# Altium PCB DP_UART_CH340G.PcbDoc
Units mil, origin at the board's own origin, x right, y up, seen from the top; angles counter-clockwise.
Board outline 1585 x 700 mil, 2 copper layers (Top Layer, Bottom Layer); 14 components, 13 nets, 55 pads, 0 vias.
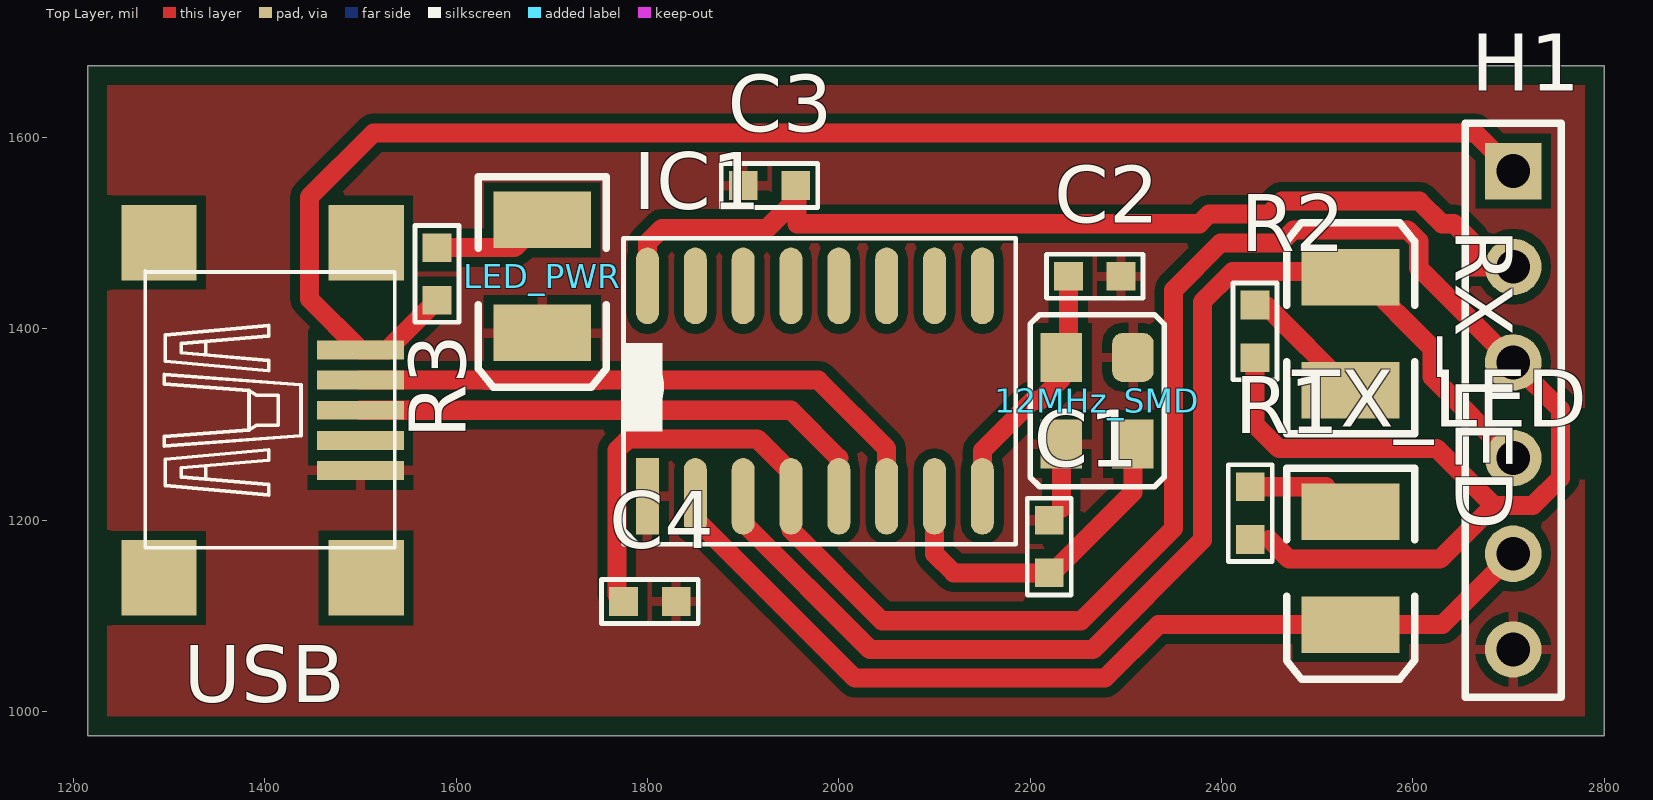
[diagram p0: Top Layer view]
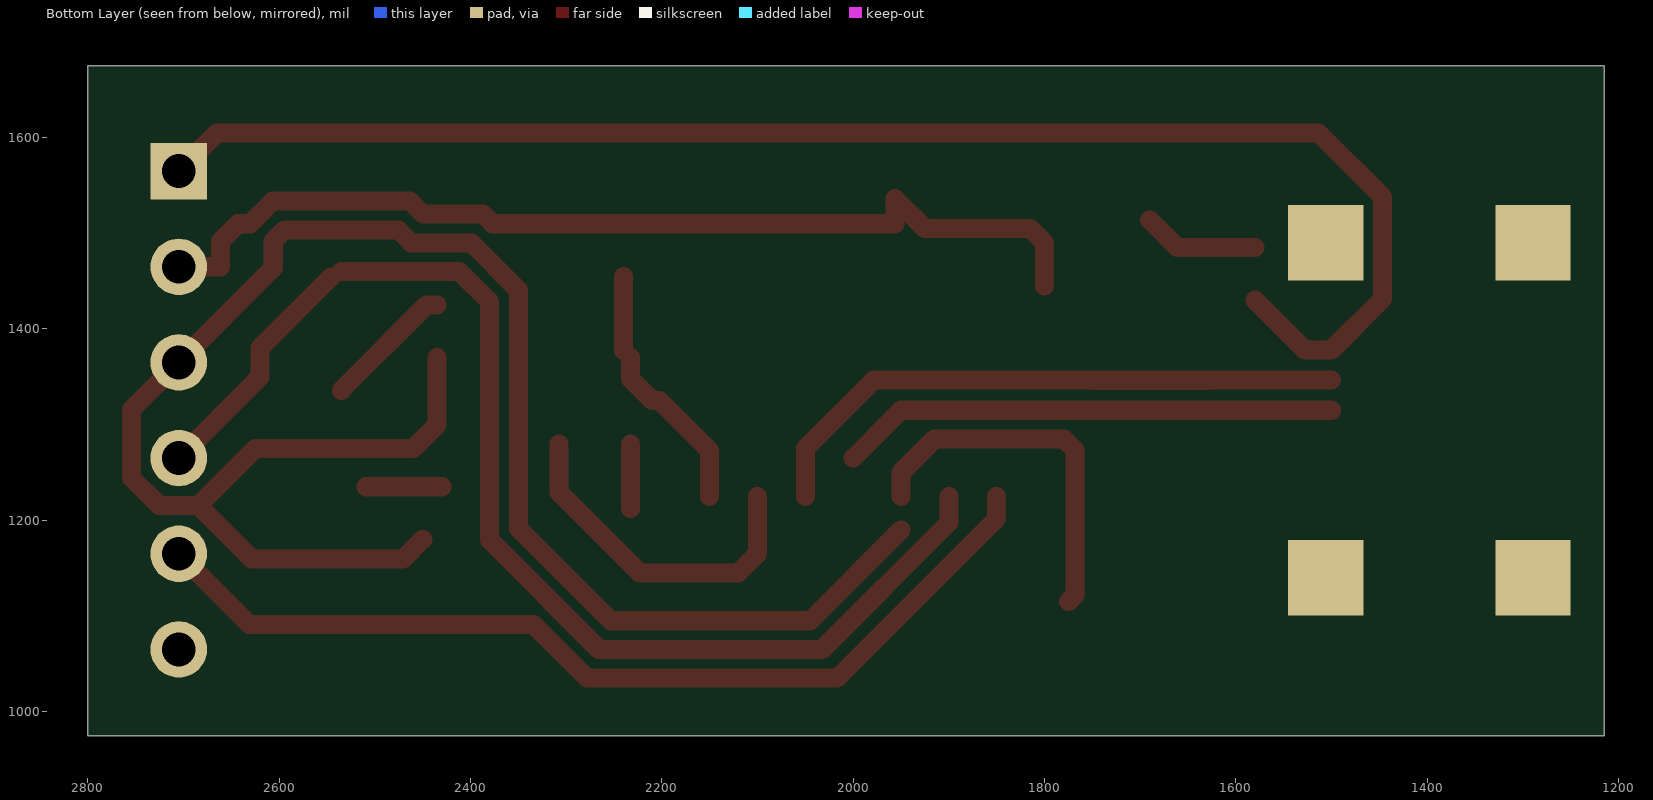
[diagram p1: Bottom Layer view, seen from below]

## Layer stack, top to bottom
Top Solder: solder mask 0.4, Solder Resist, Dk 3.5
Top Layer: signal copper 1.4
Dielectric 1: dielectric 12.6, FR-4, Dk 4.8
Bottom Layer: signal copper 1.4
Bottom Solder: solder mask 0.4, Solder Resist, Dk 3.5

## Board outline
1215,975 1215,1675 2800,1675 2800,975

## Design rules (kind name [scope] priority, off if disabled: settings)
Clearance [All] p1: gap=10
PolygonConnect [All] p1: connectstyle=Relief reliefconductorwidth=10 reliefentries=4 polygonreliefangle="90 Angle" airgapwidth=10
RoutingVias [All] p1: holewidth=28 width=50 viastyle="Through Hole" minholewidth=28 minwidth=50 maxholewidth=28 maxwidth=50
SolderMaskExpansion [All] p1: expansion=4
Width [All] p1: maxlimit=200 minlimit=10 preferedwidth=10 minimp=50.000000 maximp=50.000000 favimp=50.000000
30 further rules are at their usual default settings.

## Components (designator, comment, footprint, x,y, rotation, side; value= is the part's Value field where it differs from the comment)
12MHz_SMD "3225" "XTAL 3225" 2270,1325 r270 top
C1 "22pF" 0603C-GENERIC 2220,1145 r90 top
C2 "22pF" 0603C-GENERIC 2295,1455 r180 top
C3 "100nF" 0603C-GENERIC 1900,1550 r0 top
C4 "10nF" 0603C-GENERIC 1830,1115 r180 top
H1 "Header 6" HDR1X6 2705,1565 r270 top
IC1 "CH340G" SO16 1800,1225 r90 top
LED_PWR "LED3" 3.5X2.8X1.9 1690,1455 r270 top
R1 "0603R-1K5" 0603R-1k5 2430,1180 r90 top
R2 "0603R-1K5" 0603R-1k5 2435,1370 r90 top
R3 "0603R-1K5" 0603R-1k5 1580,1430 r90 top
RX_LED "LED3" 3.5X2.8X1.9 2535,1395 r90 top
TX_LED "LED3" 3.5X2.8X1.9 2535,1150 r270 top
USB "USB-B-MINI" USB-MINI-B 1500,1315 r0 top

## Footprints (in the part's own frame and the unit in brackets; to place one, negate y for a bottom-side part, rotate by r counter-clockwise, add the part's x,y. Pads: shape width x height; smd on the part's side, far side on the other; paste and mask are expansions set on the pad)
3.5X2.8X1.9 [mm] "SM LED; 2 C-Bend Leads; Body 3.5 x 2.8 x 1.9 mm, inc leads (LxWxH typ)"
  rect 1.5x2.6 smd: 1(-1.5,0) 2(1.5,0)
  silkscreen extent -2.65,-1.7 2.95,1.7
0603C-GENERIC [mil] "CAPACITOR 0603"
  rect 30x30 smd: 1(0,0) 2(55,0)
  silkscreen extent -23,-23 78,23, body extent -4,-15 59,15, height 19
0603R-1k5 [mil] "RESISTOR 0603"
  rect 30x30 smd: 1(0,0) 2(55,0)
  silkscreen extent -23,-23 78,23, body extent -4,-15 59,15, height 20
HDR1X6 [mm] "Connector; Header; 6 Position"
  rect 1.5x1.5 hole 0.9: 1(0,0)
  round 1.5 hole 0.9: 2(2.54,0) 3(5.08,0) 4(7.62,0) 5(10.16,0) 6(12.7,0)
  silkscreen extent -1.27,-1.27 13.97,1.27
SO16 [mil]
  rect 80x24 smd: 1(0,0)
  oval 80x24 smd: 2(0,-50) 3(0,-100) 4(0,-150) 5(0,-200) 6(0,-250) 7(0,-300) 8(0,-350) 9(220,-350) 10(220,-300) 11(220,-250) 12(220,-200) 13(220,-150) 14(220,-100) 15(220,-50) 16(220,0)
  silkscreen extent -50,-385 270,25, body extent -20,-385 240,25, height 61
USB-MINI-B [mm]
  rect 2.3x0.5 smd: 1(0,1.6) 2(0,0.8) 3(0,0) 4(0,-0.8) 5(0,-1.6)
  rect 2x2 all layers, no hole: M1(-5.35,4.45) M2(0.15,4.45) M3(-5.35,-4.45) M4(0.15,-4.45)
  silkscreen extent -5.72,-3.65 0.91,3.7, body extent -5.73,-3.93 0.96,3.77, height 4.21
"XTAL 3225" [mm] "3225 Quartz"
  rrect50% 1.3x1.1 smd: 1(-1.15,0.95)
  rect 1.3x1.1 smd: 2(1.15,0.95) 3(1.15,-0.95) 4(-1.15,-0.95)
  silkscreen extent -2.29,-1.78 2.29,1.78, body extent -2.4,-1.6 2.6,1.6, height 1

## Part data
12MHz_SMD: library part "3225 Quartz"
C1 C2: library part Passives_Capacitors_0603_22PF-50V-C0G-PAN, "CAPACITOR 0603 CERAMIC"
C3: library part Passives_Capacitors_0603_100NF-25V-X7R-TDK, "CAPACITOR 0603 CERAMIC"
C4: library part Passives_Capacitors_0603_10NF-50V-X7R-MUR, "CAPACITOR 0603 CERAMIC"
H1: "Header, 6-Pin"
LED_PWR RX_LED TX_LED: "Typical BLUE SiC LED"
R1 R2 R3: "GENERIC RESISTOR 0603"
USB: library part Connector_USB_THT_USB-B-MINI, "MINI USB B DEVICE CONNECTOR"

## Nets (pads, with @x,y where several pads share a name; then routed paths per layer and width w, separated by ;. In a path a pad name is that pad's centre, name@x,y a point inside that pad or via, vN(x,y) a via of type N, cw(c..) or ccw(c..) an arc to the next point about the centre after c; other vN are vias at no path point)
3V3: C4.2 H1.3 IC1.4 R1.1 R2.1 | length 2414.5
  Top Layer w20: C4.2 1768,1122 1768,1273.28 1779.72,1285 1915,1285 1950,1250 IC1.4 ; IC1.4@1950,1190 2045,1095 2253.28,1095 2350,1191.72 2350,1440.71 2399.29,1490 2461.95,1490 2475.53,1503.58 2594.47,1503.58 2606.18,1491.87 2606.18,1463.82 H1.3 2754.53,1315.47 2754.53,1244.48 2725.51,1215.47 2684.49,1215.47 ; R2.1 2435,1300 2460,1275 2624.96,1275 2684.49,1215.47 ; 2450,1180 2470.47,1159.53 2628.54,1159.53 2684.49,1215.47
5V0: H1.1 R3.1 USB.1 | length 1586.4
  Top Layer w20: R3.1 1527.99,1377.99 USB.1 1446.54,1431.46 1446.54,1537.85 1513.69,1605 2665,1605 H1.1
GND: 12MHz_SMD.1 12MHz_SMD.3 C1.2 C2.1 C3.1 C4.1 H1.6 IC1.1 LED_PWR.2 USB.5 | length 67.1
  Top Layer w20: C1.2@2232.6,1212.6 12MHz_SMD.3
Net12MHz_SMD_2: 12MHz_SMD.2 C1.1 IC1.7 | length 361.1
  Top Layer w20: IC1.7 2100,1165 2120,1145 C1.1 2223.28,1145 2307.4,1229.12 12MHz_SMD.2
Net12MHz_SMD_4: 12MHz_SMD.4 C2.2 IC1.8 | length 261.3
  Top Layer w20: IC1.8 2150,1272.65 2202.66,1325.31 2210.31,1325.31 2232.6,1347.6 12MHz_SMD.4 ; 12MHz_SMD.4@2240,1377.68 C2.2
NetH1_4: H1.4 IC1.3 RX_LED.2 | length 1291.7
  Top Layer w20: IC1.3 1900,1197.57 2032.57,1065 2265.71,1065 2380,1179.29 2380,1428.28 2411.72,1460 RX_LED.2@2535,1460 ; RX_LED.2@2545.94,1454.06 2620,1380 2620,1350 H1.4 H1.4@2705,1274.94
NetH1_5: H1.5 IC1.2 TX_LED.2 | length 1001.2
  Top Layer w20: IC1.2 1850,1201.75 2016.75,1035 2278.14,1035 2334.08,1090.94 TX_LED.2 2630.94,1090.94 H1.5
NetIC1_5: IC1.5 USB.3 | length 520.7
  Top Layer w20: USB.3 1950,1315 2000,1265
NetIC1_6: IC1.6 USB.2 | length 629.7
  Top Layer w20: USB.2 1630.46,1346.5 1630.53,1346.42 1749.47,1346.42 1749.54,1346.5 1978.5,1346.5 2050,1275 IC1.6
NetLED_PWR_1: LED_PWR.1 R3.2 | length 122
  Top Layer w20: R3.2 1660.94,1485 LED_PWR.1
NetR1_2: R1.2 TX_LED.1 | length 79.1
  Top Layer w20: R1.2 TX_LED.1@2509.06,1235
NetR2_2: R2.2 RX_LED.1 | length 136.9
  Top Layer w20: R2.2 2445.94,1425 RX_LED.1
VCC: C3.2 H1.2 IC1.16 | length 1049.2
  Top Layer w20: IC1.16 1800,1490 1815,1505 1925,1505 1956.18,1536.18 1956.18,1510 2376.86,1510 2386.86,1520 2449.52,1520 2463.11,1533.58 2606.89,1533.58 2630.48,1510 2643.05,1510 2661.18,1491.87 2661.18,1465 H1.2
pads on no net: IC1.9 IC1.10 IC1.11 IC1.12 IC1.13 IC1.14 IC1.15 USB.4 USB.M1 USB.M2 USB.M3 USB.M4

## Polygon pours and split planes (outlines as drawn)
GND on Top Layer "Top Layer-No Net" (solid, remove dead copper, pour order 7): 1215,1675 2800,1675 2800,975 1215,975